# Altium PCB PCB1.PcbDoc
Units mil, origin at the board's own origin, x right, y up, seen from the top; angles counter-clockwise.
Board outline 820 x 2400 mil, 2 copper layers (Top Layer, Bottom Layer); 19 components, 12 nets, 63 pads, 8 vias.
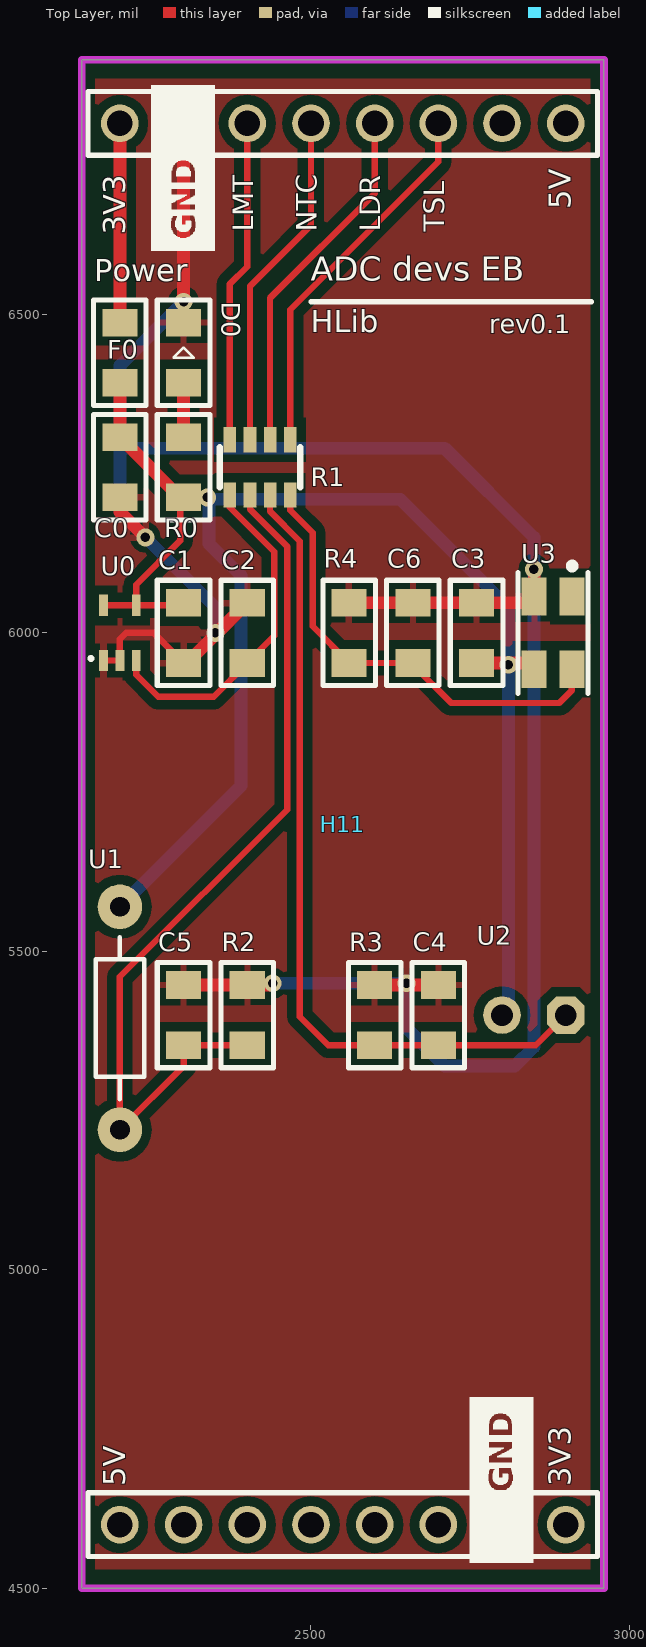
[diagram p0: Top Layer view]
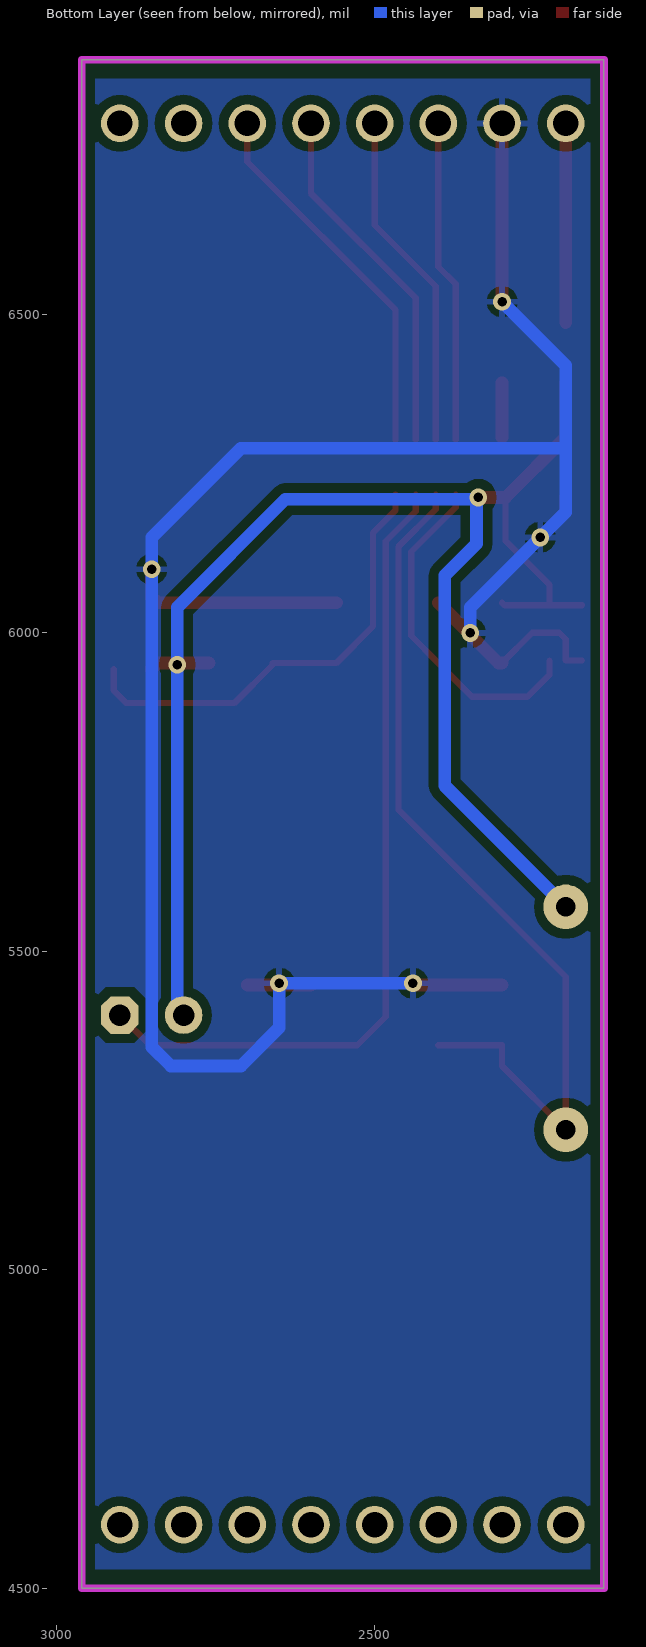
[diagram p1: Bottom Layer view, seen from below]
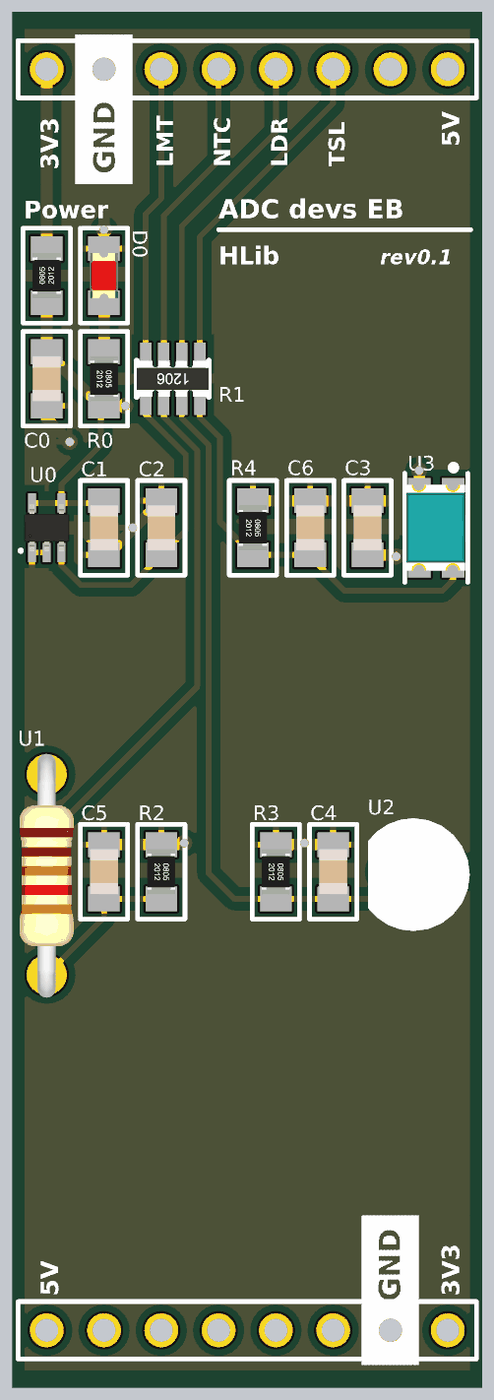
[diagram p2: 3D render of the assembled board from above, using the file's embedded part models]

## Layer stack, top to bottom
Top Solder: solder mask 0.4, Solder Resist, Dk 3.5
Top Layer: signal copper 1.4
Dielectric1: dielectric 12.6, FR-4, Dk 4.8
Bottom Layer: signal copper 1.4
Bottom Solder: solder mask 0.4, Solder Resist, Dk 3.5

## Board outline
2140,4500 2140,6900 2960,6900 2960,4500

## Design rules (kind name [scope] priority, off if disabled: settings)
Clearance [InPolygon] p1: gap=15
Clearance Clearance_1 [All] p2: gap=10
PolygonConnect [All] p1: connectstyle=Relief reliefconductorwidth=10 reliefentries=4 polygonreliefangle="90 Angle" airgapwidth=10
RoutingVias [All] p1: holewidth=25 width=40 viastyle="Through Hole" minholewidth=28 minwidth=50 maxholewidth=28 maxwidth=50
SolderMaskExpansion [All] p1: expansion=4
Width [All] p1: maxlimit=25 minlimit=8 preferedwidth=10
30 further rules are at their usual default settings.

## Components (designator, comment, footprint, x,y, rotation, side; value= is the part's Value field where it differs from the comment)
C0 "C_Ceramic" SM_0805_C_CERAMIC 2200,6260 r90 top
C1 "C_Ceramic" SM_0805_C_CERAMIC 2300,6000 r90 top
C2 "C_Ceramic" SM_0805_C_CERAMIC 2400,6000 r270 top
C3 "C_Ceramic" SM_0805_C_CERAMIC 2760,6000 r270 top
C4 "C_Ceramic" SM_0805_C_CERAMIC 2700,5400 r270 top
C5 "C_Ceramic" SM_0805_C_CERAMIC 2300,5400 r270 top
C6 "C_Ceramic" SM_0805_C_CERAMIC 2660,6000 r270 top
D0 "LED" SM_0805_LED 2300,6440 r90 top
F0 "R" SM_0805_R 2200,6440 r90 top
H11 "MBoard1_BH_DualPorts" MBoard1_BH_DualPorts 2200,6800 r0 top
R0 "R" SM_0805_R 2300,6260 r270 top
R1 "330" RA4 2420,6260 r180 top
R2 "" SM_0805_R 2400,5400 r270 top
R3 "" SM_0805_R 2600,5400 r270 top
R4 "" SM_0805_R 2560,6000 r270 top
U0 "LMT8x" SC70-5 2200,6000 r0 top
U1 "NTC" R1/4W 2200,5220 r90 top
U2 "Lumi" PhotoRes-5mm 2900,5400 r180 top
U3 "TSL12T" "4-LEAD SMD" 2880,6000 r270 top

## Footprints (in the part's own frame and the unit in brackets; to place one, negate y for a bottom-side part, rotate by r counter-clockwise, add the part's x,y. Pads: shape width x height; smd on the part's side, far side on the other; paste and mask are expansions set on the pad)
"4-LEAD SMD" [mm]
  rect 1.5x1 smd: 1(-1.45,0.75) 2(-1.45,-0.75) 3(1.45,-0.75) 4(1.45,0.75)
  silkscreen extent -2.79,-1.4 2.41,1.4, body extent -1.91,-1.32 1.9,1.28, height 1.3
MBoard1_BH_DualPorts [mm]
  round 1.5 hole 1.02: 1(0,0) 2(2.54,0) 3(5.08,0) 4(7.62,0) 5(10.16,0) 6(12.7,0) 7(15.24,0) 8(17.78,0) 9(17.78,-55.88) 10(15.24,-55.88) 11(12.7,-55.88) 12(10.16,-55.88) 13(7.62,-55.88) 14(5.08,-55.88) 15(2.54,-55.88) 16(0,-55.88)
  silkscreen extent -1.27,-57.15 19.05,1.27, body extent -1.27,-57.15 19.05,1.27, height 8
PhotoRes-5mm [mm] "Photoresistor 5mm"
  oct 1.5x1.5 hole 0.864: 1(0,0)
  round 1.5 hole 0.864: 2(2.54,0)
  body extent -0.98,-2.37 3.52,2.63, height 4
R1/4W [mil] "R 1/4W, 2 Pin, 350mil"
  round 70 hole 31: 1(0,0) 2(350,0)
  silkscreen extent 48,-38 302,38, body extent -40,-47 386,47, height 111
RA4 [mm] "Resistor Array (0603x4) form TME"
  rect 0.5x1 smd: 1(-1.2,-1.1) 2(-1.2,1.1) 3(-0.4,-1.1) 4(-0.4,1.1) 5(0.4,-1.1) 6(0.4,1.1) 7(1.2,-1.1) 8(1.2,1.1)
  silkscreen extent -1.6,-0.8 1.6,0.8, body extent -1.6,-0.8 1.6,0.8, height 0.5
SC70-5 [mm]
  rect 0.35x0.85 smd: 1(-0.65,-1.1) 2(0,-1.1) 3(0.65,-1.1) 4(0.65,1.1) 5(-0.65,1.1)
  silkscreen extent -1.16,-1.03 -1.14,-1.01, body extent -1,-1.05 1,1.05, height 0.95
SM_0805_C_CERAMIC [mm] "General Surface-mount cap, low density"
  rect 1.1x1.4 smd: 1(-1.2,0) 2(1.2,0)
  silkscreen extent -2.1,-1.05 2.1,1.05, body extent -1,-0.62 1,0.63, height 0.58
SM_0805_LED [mm] "General polarized surface-mount Led, low density"
  rect 1.1x1.4 smd: 1(-1.2,0) 2(1.2,0)
  silkscreen extent -2.1,-1.05 2.1,1.05, body extent -1.01,-0.62 1.01,0.63, height 1.1
SM_0805_R [mm] "General Surface-mount resistor, low density"
  rect 1.1x1.4 smd: 1(-1.2,0) 2(1.2,0)
  silkscreen extent -2.1,-1.05 2.1,1.05, body extent -1,-0.63 1,0.62, height 0.45

## Part data
C0 C1 C2 C3 C4 C5 C6: "Non-polarity ceramic capacitor"
F0 R0: "Resistor"
R1: library part RA4
R2 R3 R4 U1 U2: library part R, "Resistor"
U3: "AMS TSL12T Ambient light sensor, Voltage output"

## Via types
v1: diameter 28, hole 15, Top Layer to Bottom Layer, tented both sides, 8 vias

## Nets (pads, with @x,y where several pads share a name; then routed paths per layer and width w, separated by ;. In a path a pad name is that pad's centre, name@x,y a point inside that pad or via, vN(x,y) a via of type N, cw(c..) or ccw(c..) an arc to the next point about the centre after c; other vN are vias at no path point)
3V3: C0.2 C1.2 C3.2 F0.1 R0.2 U0.4 U0.5 U1.2 U2.2 U3.3 | length 2600.1
  Top Layer w10: U0.5 U0.4 ; R0.2@2294.49,6212.76 2294.49,6144.49 2225.59,6075.59 U0.4 ; C1.2 2296.06,6043.31 U0.4
  Top Layer w20: F0.1 C0.2 R0.2@2294.49,6212.76 ; R0.2 v1(2337.24,6212.76) ; C3.2 2840.63,5952.76 U3.3
  Bottom Layer w20: U1.2 2390,5760 2390,6090 2340,6140 2340,6210 2640,6210 2810,6040 v1(2810,5950) 2810,5410 U2.2
GND: C0.1 C1.1 C2.1 C3.1 C4.1 C5.1 C6.1 D0.2 H11.2 R2.1 R3.1 R4.1 U0.1 U0.2 U3.2 | length 3908.7
  Top Layer w10: U0.1 U0.2 2200,5990 2210,6000 2252.76,6000 C1.1
  Top Layer w20: C0.1 2200,6190 v1(2240,6150) ; C5.1 R2.1 2437.24,5447.24 v1(2440,5450) ; C1.1 2305.51,5952.76 C2.1 ; v1(2300,6520) H11.2 ; R4.1 2840.63,6047.24 U3.2 2850.47,6099.53 v1(2850,6100) ; R3.1 C4.1
  Bottom Layer w20: v1(2300,6520) 2200,6420 2200,6290 ; v1(2350,6000) 2350,6040 v1(2240,6150) 2200,6190 2200,6290 ; v1(2440,5450) v1(2650,5450) 2650,5380 2710,5320 2820,5320 2850,5350 v1(2850,6100) 2850,6150 2710,6290 2200,6290
LDR_IN: C4.2 R1.4 R3.2 U2.1 | length 1294.2
  Top Layer w10: R1.4 2435.75,6190.82 2482.56,6144.01 2482.56,5397.44 2527.24,5352.76 C4.2 2852.76,5352.76 U2.1
LM_IN: C2.2 R1.8 U0.3 | length 543.3
  Top Layer w10: U0.3 2225.59,5934.41 2260,5900 2347.24,5900 C2.2 2442.56,5995.31 2442.56,6127.44 2372.76,6197.24 R1.8
NetD0_1: D0.1 R0.1 | length 85.5
  Top Layer w20: R0.1 D0.1
NetF0_2: F0.2 H11.1 | length 312.8
  Top Layer w20: F0.2 H11.1
NetH11_3: H11.3 R1.7 | length 508
  Top Layer w10: R1.7 2372.76,6547.76 2400,6575 H11.3
NetH11_4: H11.4 R1.5 | length 536.4
  Top Layer w10: R1.5 2404.25,6544.25 2500,6640 H11.4
NetH11_5: H11.5 R1.3 | length 564.7
  Top Layer w10: R1.3 2435.75,6525.75 2600,6690 H11.5
NetH11_6: H11.6 R1.1 | length 593.1
  Top Layer w10: R1.1 2467.24,6507.24 2700,6740 H11.6
NTC_IN: C5.2 R1.6 R2.2 U1.1 | length 1403.8
  Top Layer w10: R2.2 C5.2 2300,5320 U1.1 2200,5460 2462.56,5722.56 2462.56,6135.73 2404.25,6194.03 R1.6
TSL_IN: C6.2 R1.2 R4.2 U3.4 | length 721
  Top Layer w10: R1.2 2467.24,6192.76 2502.56,6157.44 2502.56,6010.2 R4.2 C6.2 2660,5950 2720,5890 2890,5890 2909.53,5909.53 U3.4
pads on no net: H11.7 H11.8 H11.9 H11.10 H11.11 H11.12 H11.13 H11.14 H11.15 H11.16 U3.1

## Polygon pours and split planes (outlines as drawn)
GND on Bottom Layer "Bot" (solid, remove dead copper, pour order 2): 2140,6870 2960,6870 2960,4530 2140,4530
GND on Top Layer "Top" (solid, remove dead copper, pour order 2): 2140,6870 2960,6870 2960,4530 2140,4530

## Keep-outs
Keep-Out Layer:
  the board outline again, w12

## Silkscreen, mask and mechanical layers (free items; w line width, h text height)
Top Overlay:
  drawing of 607 lines, arcs and shapes, not listed
  text "5V" at 2920,6665 h60 r90
  text "LMT" at 2420,6630 h55 r90
  text "NTC" at 2520,6630 h55 r90
  text "LDR" at 2620,6630 h55 r90
  text "TSL" at 2720,6630 h55 r90
  text "3V3" at 2220,6625 h60 r90
  text "Power" at 2160,6540 h60
  text "ADC devs EB" at 2500,6540 h65
  text "HLib" at 2500,6460 h60
  text "rev0.1" at 2780,6460 h50
  text "5V" at 2220,4660 h60 r90
  text "3V3" at 2920,4660 h60 r90
Drill Drawing:
  text ".LEGEND" at 7200,3200 h60
  text "Drill Drawing." at 7200,3100 h60

## Dimensions
2140,4500 to 2140,6900 on Mechanical 1
2140,4500 to 2960,4500 on Mechanical 1